# Altium PCB BMS Master.PcbDoc
Units mil, origin at the board's own origin, x right, y up, seen from the top; angles counter-clockwise.
Board outline 6000 x 4000 mil, 2 copper layers (Top Layer, Bottom Layer); 88 components, 63 nets, 313 pads, 57 vias.
Unrouted connection lines stored in the file: 47.
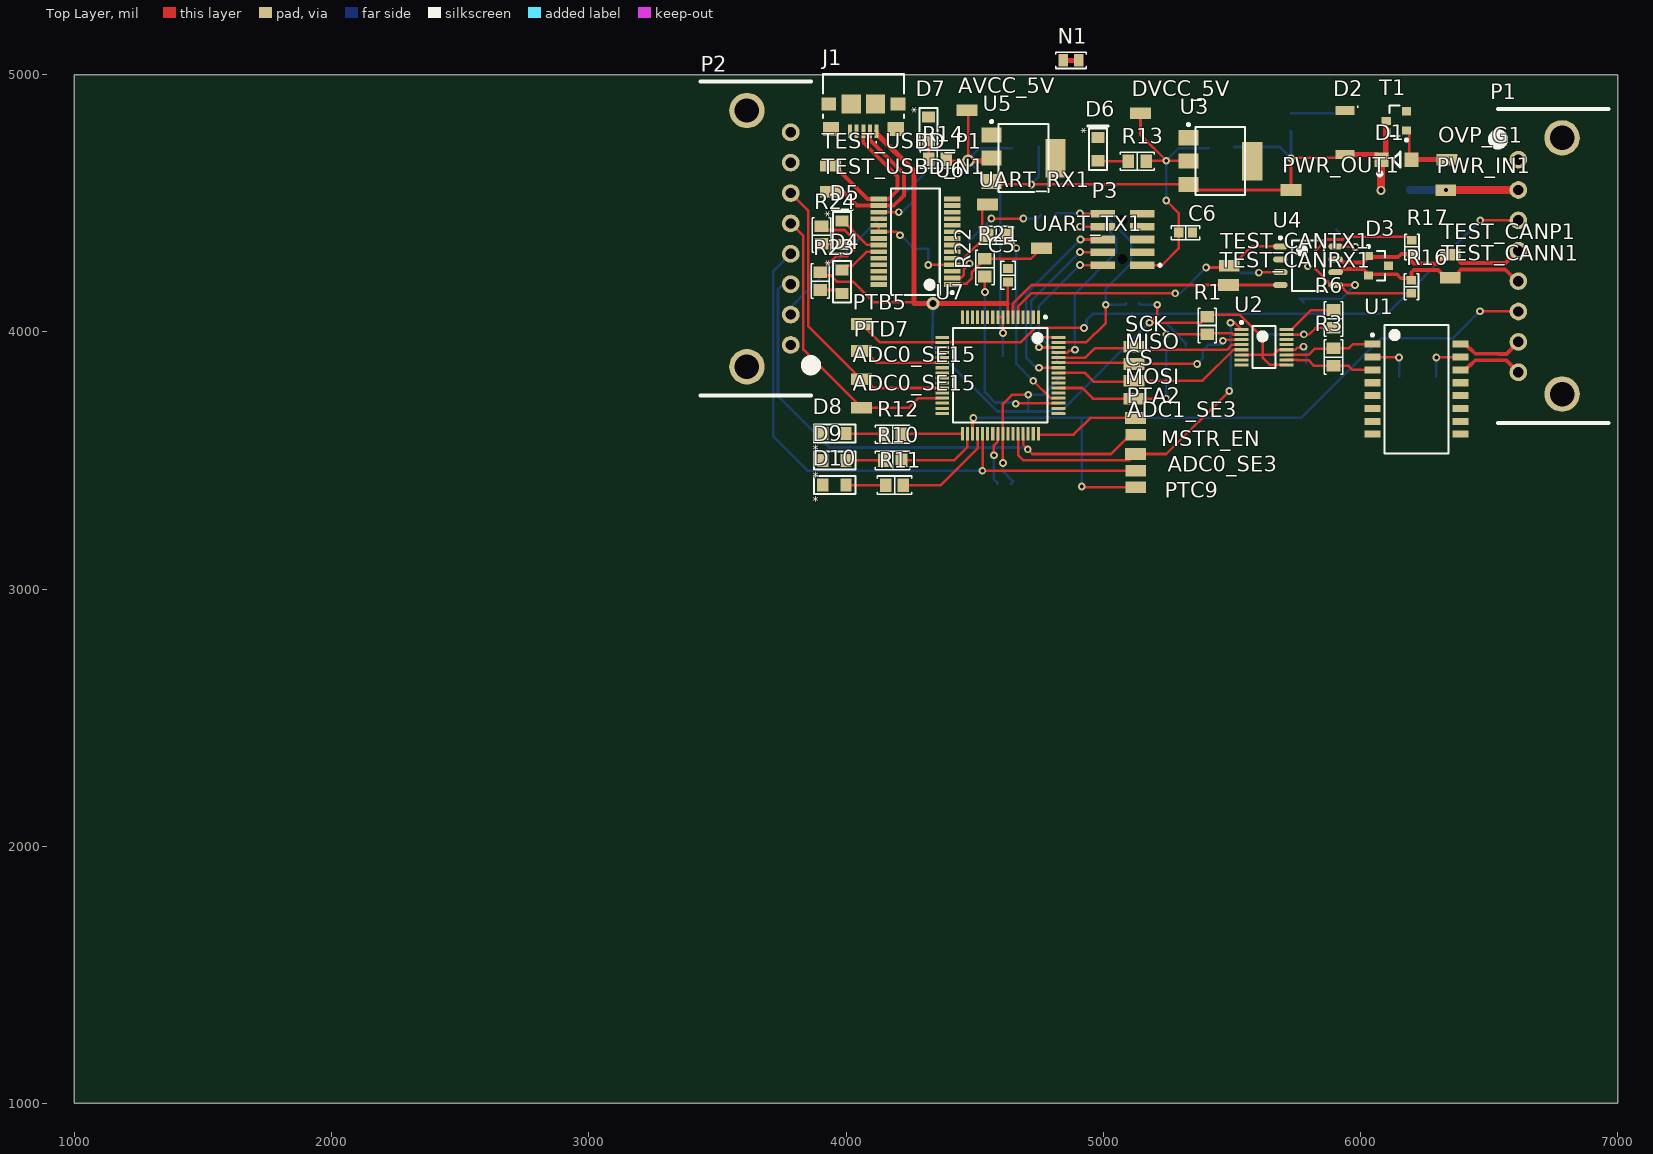
[diagram p0: Top Layer view]
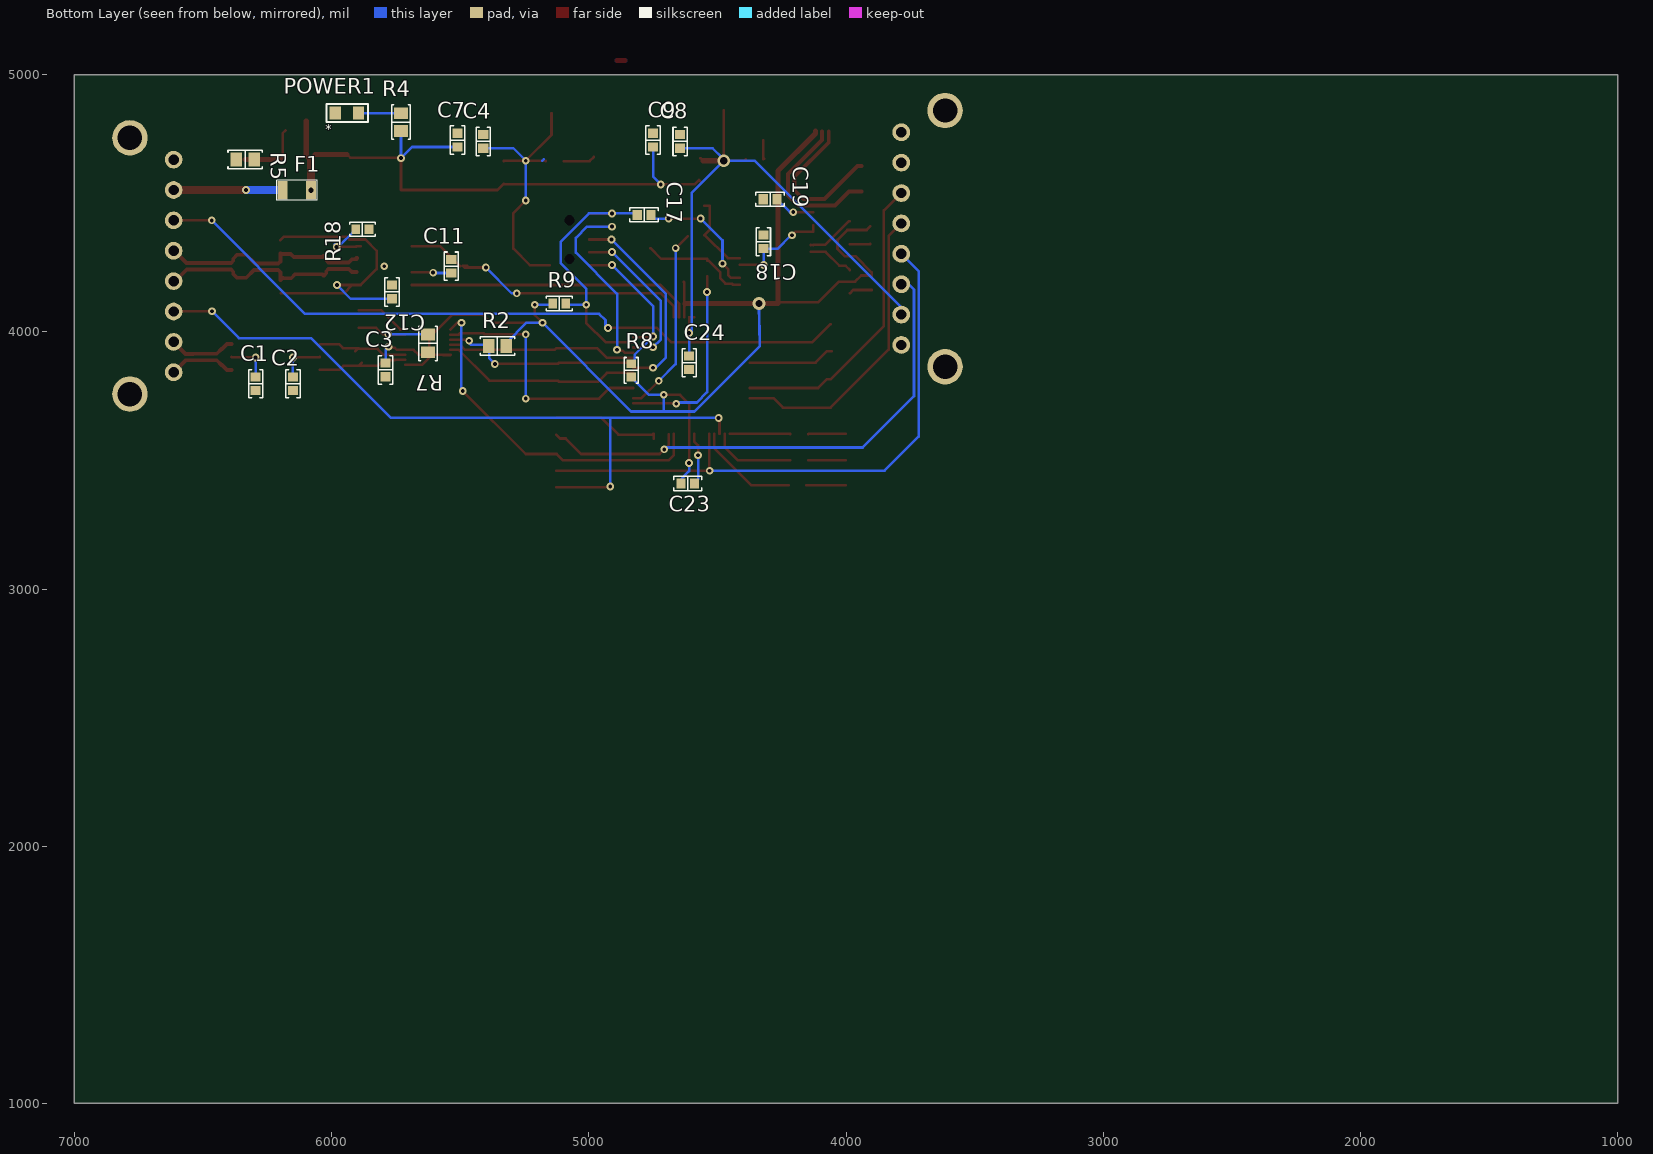
[diagram p1: Bottom Layer view, seen from below]
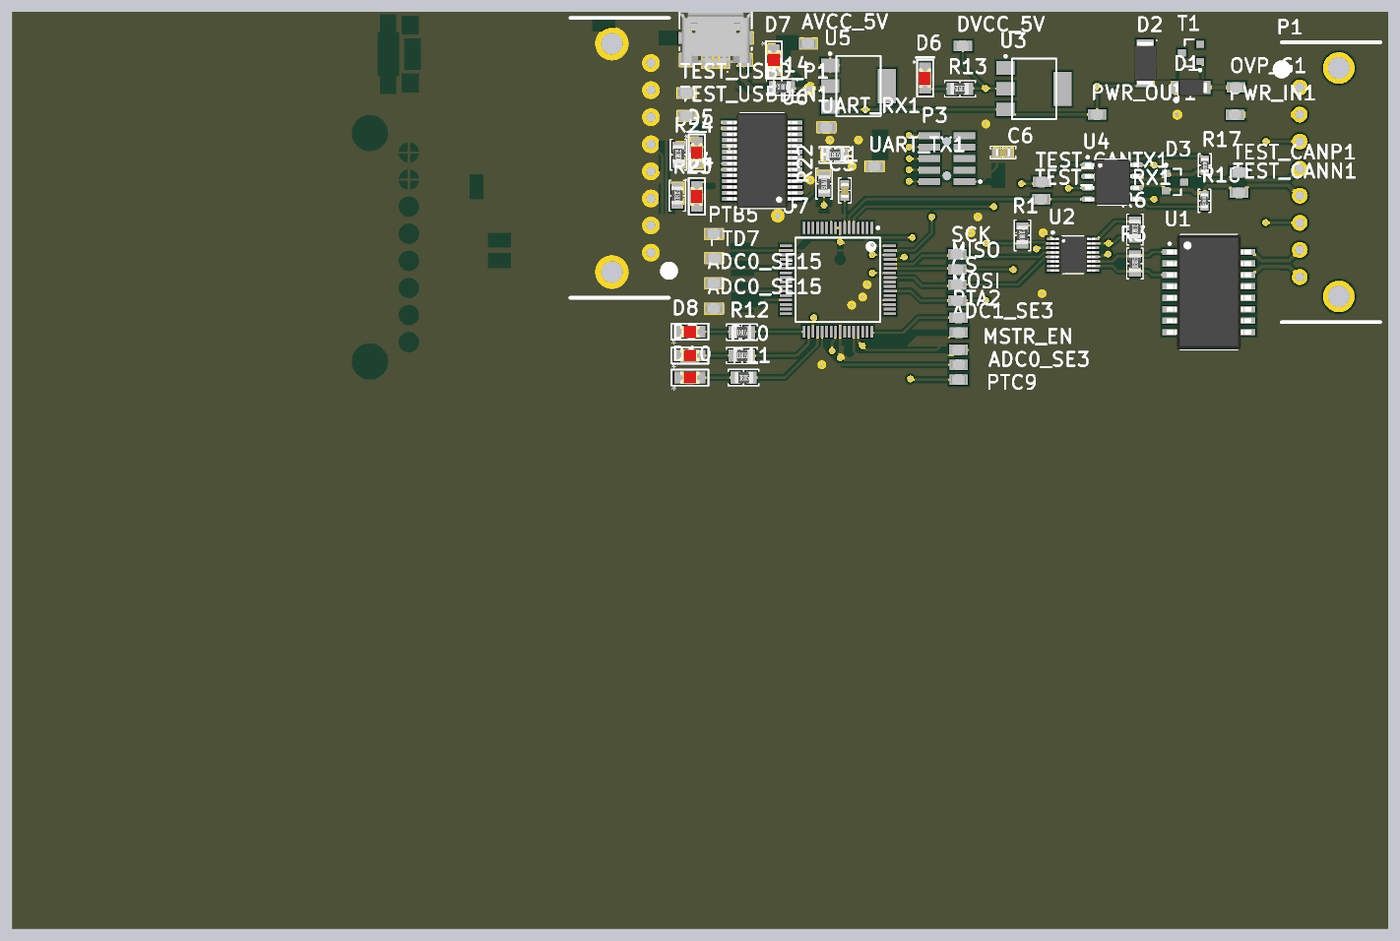
[diagram p2: 3D render of the assembled board from above, using the file's embedded part models]
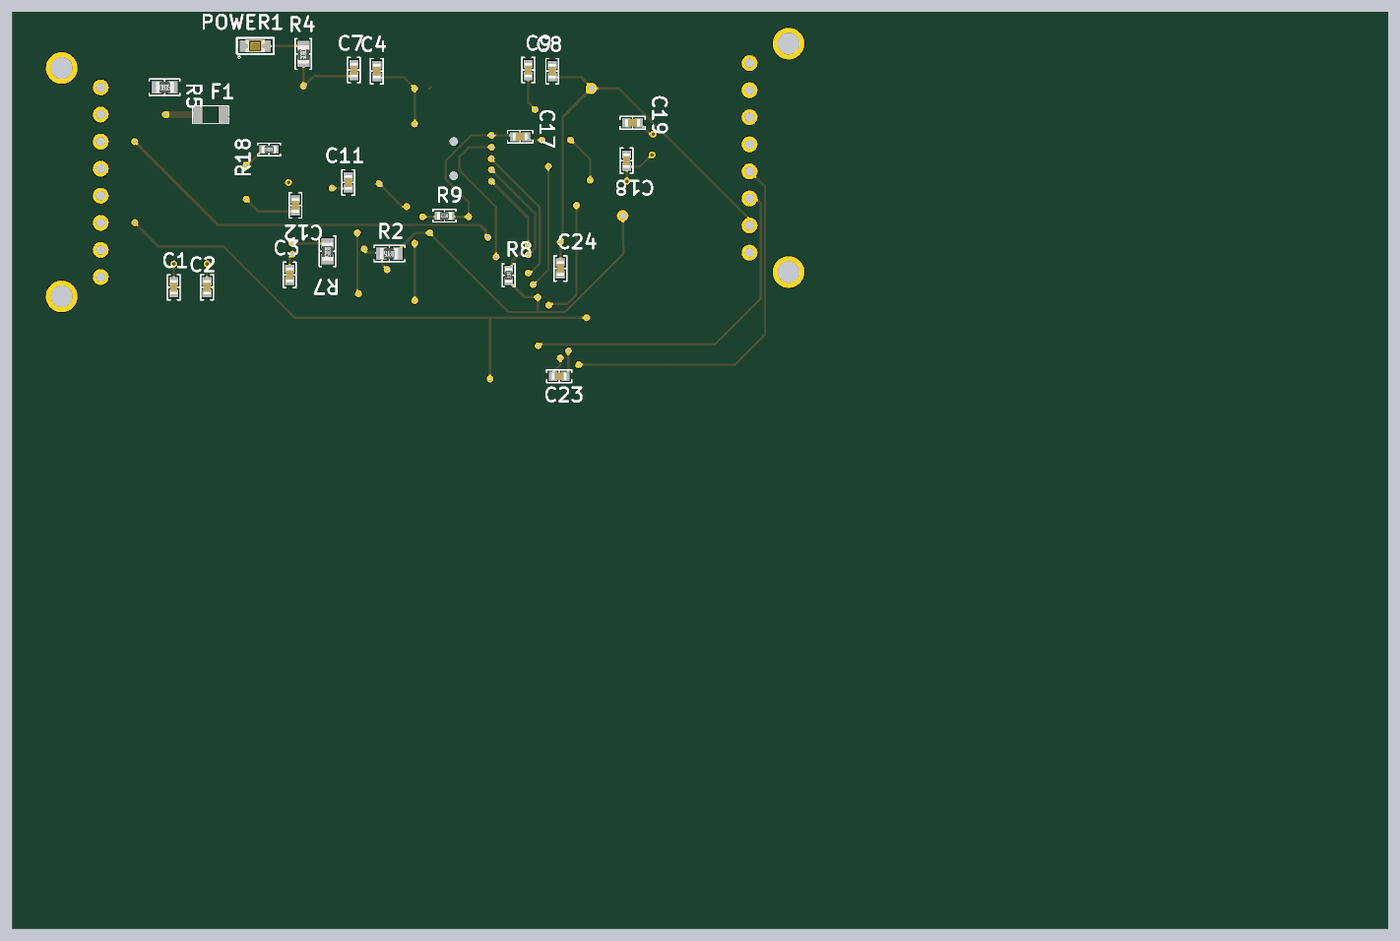
[diagram p3: 3D render of the assembled board from below, using the file's embedded part models]

## Layer stack, top to bottom
Top Solder: solder mask 0.4, Solder Resist, Dk 3.5
Top Layer: signal copper 1.4
Dielectric 1: dielectric 12.6, FR-4, Dk 4.8
Bottom Layer: signal copper 1.4
Bottom Solder: solder mask 0.4, Solder Resist, Dk 3.5

## Board outline
1000,1000 7000,1000 7000,5000 1000,5000

## Design rules (kind name [scope] priority, off if disabled: settings)
Clearance [All] p1: gap=10 ignorepadtopadclearanceinfootprint=FALSE except(0: Arc-Hole Track-Hole SMDPad-Hole THPad-Hole Via-Hole Fill-Hole Poly-Hole Region-Hole Text-Hole; 7: SMDPad-SMDPad; 8: Arc-Arc Arc-Track Arc-SMDPad Track-Track Track-SMDPad)
DiffPairsRouting [All] p1: maxlimit=10 minlimit=10 mostfreqgap=10 toplayer_minwidth=15 toplayer_maxwidth=15 toplayer_prefwidth=15 bottomlayer_minwidth=15 bottomlayer_maxwidth=15 bottomlayer_prefwidth=15 maxuncoupledlength=500
MatchedLengths "Schematic Matched Net Lengths" [InNet('D_N')] p1: tolerance=10 checknetsindiffpair=FALSE checkdiffpairvsdiffpair=TRUE checkxsignals=TRUE checkothers=TRUE
PolygonConnect [All] p1: connectstyle=Relief reliefconductorwidth=10 reliefentries=4 polygonreliefangle="90 Angle" airgapwidth=10
RoutingVias [All] p1: holewidth=28 width=50 viastyle="Through Hole" minholewidth=28 minwidth=50 maxholewidth=28 maxwidth=50
SolderMaskExpansion [All] p1: expansion=4
Width [All] p1: maxlimit=50 minlimit=10 preferedwidth=10
29 further rules are at their usual default settings.

## Classes and differential pairs
component class U_USB: C17 C18 C19 D4 D5 J1 R21 R22 R23 R24 TEST_USBD_N1 TEST_USBD_P1 U6 UART_RX1 UART_TX1
component class U_RVP_OVP_LC: D1 D2 OVP_G1 POWER1 PWR_IN1 PWR_OUT1 R4 R5 T1
component class U_Power: AVCC_5V C4 C7 C8 C9 D6 D7 DVCC_5V R13 R14 U3 U5
component class U_MCU_MKE185F512VLH16: ADC0_SE3 ADC0_SE15 ADC1_SE3 C5 C6 C23 C24 CS D8 D9 D10 MISO MOSI MSTR_EN P3 PTA2 PTB5 PTC9 PTD7 R8 R9 R10 R11 R12 SCK TEST_CANRX1 TEST_CANTX1 U7
component class U_CAN_Tranceiver: C11 C12 D3 R16 R17 R18 TEST_CANN1 TEST_CANP1 U4
component class "BMS Master": C1 C2 C3 F1 N1 P1 P2 R1 R2 R3 R6 R7 U1 U2
differential pair ISO: +ISO_P -ISO_N
differential pair D: +D_P -D_N
differential pair CAN: +CAN_P -CAN_N

## Components (designator, comment, footprint, x,y, rotation, side; value= is the part's Value field where it differs from the comment)
ADC0_SE3 "RCU-0C" RCU-0C#1 5126.65,3460 r270 top
ADC0_SE15 "RCU-0C" RCU-0C#1 4060,3815 r90 top
ADC0_SE15 "RCU-0C" RCU-0C#1 4060,3705 r90 top
ADC1_SE3 "RCU-0C" RCU-0C#1 5126.65,3600 r270 top
AVCC_5V "RCU-0C" RCU-0C#1 4470,4860.63 r90 top
C1 "Capacitor MLCC 27pf 25V CAP 0603/1608" "CAP 0603/1608" 6295,3797.8 r90 bottom value=27pf
C2 "Capacitor MLCC 27pf 25V CAP 0603/1608" "CAP 0603/1608" 6150,3797.8 r90 bottom value=27pf
C3 "Capacitor MLCC 0.10uf 25V CAP 0603/1608" "CAP 0603/1608" 5790,3851.85 r270 bottom value=0.10uf
C4 "Capacitor MLCC 10uf 25V CAP 0603/1608" "CAP 0603/1608" 5410,4740 r270 bottom value=10uf
C5 "Capacitor MLCC 0.10uf 25V CAP 0603/1608" "CAP 0603/1608" 4630,4220 r270 top value=0.10uf
C6 "Capacitor MLCC 0.10uf 16V CAP 0603/1608" "CAP 0603/1608" 5320,4385.55 r180 top value=0.10uf
C7 "Capacitor MLCC 10uf 25V CAP 0603/1608" "CAP 0603/1608" 5510,4745 r270 bottom value=10uf
C8 "Capacitor MLCC 10uf 25V CAP 0603/1608" "CAP 0603/1608" 4645,4740 r270 bottom value=10uf
C9 "Capacitor MLCC 10uf 25V CAP 0603/1608" "CAP 0603/1608" 4750,4745 r270 bottom value=10uf
C11 "Capacitor MLCC 0.10uf 50V CAP 0603/1608" "CAP 0603/1608" 5534.45,4255 r270 bottom value=0.10uf
C12 "Capacitor MLCC 4700pf 50V CAP 0603/1608" "CAP 0603/1608" 5765,4155 r270 bottom value=4700pf
C17 "Capacitor MLCC 0.10uf 25V CAP 0603/1608" "CAP 0603/1608" 4785,4454.45 r0 bottom value=0.10uf
C18 "Capacitor MLCC 0.10uf 25V CAP 0603/1608" "CAP 0603/1608" 4321.1,4350 r270 bottom value=0.10uf
C19 "Capacitor MLCC 0.10uf 25V CAP 0603/1608" "CAP 0603/1608" 4295,4515 r180 bottom value=0.10uf
C23 "Capacitor MLCC 100pf 25V CAP 0603/1608" "CAP 0603/1608" 4615,3410 r0 bottom value=100pf
C24 "Capacitor MLCC 0.10uf 25V CAP 0603/1608" "CAP 0603/1608" 4609.84,3879.8 r90 bottom value=0.10uf
CS "RCU-0C" RCU-0C#1 5120,3810 r90 top
D1 "DDZ9701-7" SOD123F 6140,4669.29 r180 top value=14Vz
D2 "DIODE" SOD-128 5940,4775 r270 top value=5A
D3 "NUP1105LT1G" "SOT-23 (TO-236)" 6070,4256.81 r0 top value=TVS_24V
D4 "" 0805_LED 3985,4194.72 r90 top value=Green
D5 "" 0805_LED 3985,4385 r90 top value=Red
D6 "LED" 0805_LED 4980,4710 r90 top value=Red
D7 "LED" 0805_LED 4321.1,4790 r90 top value=Green
D8 "LED" 0805_LED 3955,3604.21 r180 top value=Green
D9 "LED" 0805_LED 3955,3500 r180 top value=Green
D10 "LED" 0805_LED 3955,3403.94 r180 top value=Green
DVCC_5V "RCU-0C" RCU-0C#1 5145,4850 r90 top
F1 "2.2A" "PTC Fuse 1206/3216" 6135,4550 r0 bottom
J1 "1981568-1" TECO-1981568-5_V 4067.24,4779.69 r180 top value=CONN
MISO "RCU-0C" RCU-0C#1 5120,3875 r90 top
MOSI "RCU-0C" RCU-0C#1 5120,3740 r90 top
MSTR_EN "RCU-0C" RCU-0C#1 5125,3525 r270 top
N1 "Net_Tie" Net_Tie 4875,5055 r0 top
OVP_G1 "RCU-0C" RCU-0C#1 6336.18,4669.29 r90 top
P1 "2-1445054-8" 2-1445054-8 6613.74,4669.29 r90 top
P2 "2-1445054-8" 2-1445054-8 3785,3948.78 r270 top
P3 "5103309-1" HDR2X5_SMT 5075,4358.62 r90 top value=CONN
POWER1 "LED" 0805_LED 5940,4850 r0 bottom value=Green
PTA2 "RCU-0C" RCU-0C#1 5125,3665 r270 top
PTB5 "RCU-0C" RCU-0C#1 4060,4030 r90 top
PTC9 "RCU-0C" RCU-0C#1 5126.65,3395 r90 top
PTD7 "RCU-0C" RCU-0C#2 4064.04,3925 r90 top
PWR_IN1 "RCU-0C" RCU-0C#1 6331.48,4550 r90 top
PWR_OUT1 "RCU-0C" RCU-0C#1 5730,4551.18 r90 top
R1 "Resistor 10k 0805 1/10W 10%" "RES 0805/2012" 5404.45,4024.45 r90 top value=10k
R2 "Resistor 10k 0805 1/10W 10%" "RES 0805/2012" 5355,3945 r0 bottom value=10k
R3 "Resistor 120 0805 1/10W 10%" "RES 0805/2012" 5895,3901.85 r90 top value=120
R4 "Resistor 470 0805 1/10W 1%" "RES 0805/2012" 5730,4815 r270 bottom value=470
R5 "Resistor 47k 0805 1/10W 1%" "RES 0805/2012" 6335.55,4670 r180 bottom value=47k
R6 "Resistor 1.5k 0805 1/10W 10%" "RES 0805/2012" 5895,4050 r90 top value=1.5k
R7 "Resistor 1.0k 0805 1/10W 10%" "RES 0805/2012" 5625,3955 r270 bottom value=1.0k
R8 "Resistor 10k 0603 1/10W 1%" "RES 0603/1608" 4835,3850 r270 bottom value=10k
R9 "Resistor 10k 0603 1/10W 5%" "RES 0603/1608" 5115,4110 r0 bottom value=10k
R10 "Resistor 200 0805 1/10W 5%" "RES 0805/2012" 4181.46,3500 r0 top value=200
R11 "Resistor 200 0805 1/10W 5%" "RES 0805/2012" 4188.62,3403.94 r0 top value=200
R12 "Resistor 200 0805 1/10W 5%" "RES 0805/2012" 4181.46,3601.85 r0 top value=200
R13 "Resistor 200 0805 1/10W 5%" "RES 0805/2012" 5132.2,4663.39 r180 top value=200
R14 "Resistor 200 0805 1/10W 5%" "RES 0805/2012" 4355.55,4670.77 r180 top value=200
R16 "Resistor 62 0603 1/10W 5%" "RES 0603/1608" 6198.03,4175 r270 top value=62
R17 "Resistor 62 0603 1/10W 5%" "RES 0603/1608" 6200,4330 r270 top value=62
R18 "Resistor 100 0603 1/10W 10%" "RES 0603/1608" 5880,4398.7 r0 bottom value=100
R21 "Resistor 1.0k 0805 1/4W 1%" "RES 0805/2012" 4540,4249.45 r270 top value=1.0k
R22 "Resistor 1.0k 0805 1/4W 1%" "RES 0805/2012" 4585,4375 r0 top value=1.0k
R23 "Resistor 1.0k 0805 1/4W 1%" "RES 0805/2012" 3900,4196.85 r90 top value=1.0k
R24 "Resistor 1.0k 0805 1/4W 1%" "RES 0805/2012" 3905,4376.14 r90 top value=1.0k
SCK "RCU-0C" RCU-0C#1 5120,3942.2 r90 top
T1 "DMG2302UK-7" SOT23-3 6139.65,4820 r180 top value=N_Channel
TEST_CANN1 "RCU-0C" RCU-0C#1 6349.2,4210 r90 top
TEST_CANP1 "RCU-0C" RCU-0C#1 6349.2,4299.21 r90 top
TEST_CANRX1 "RCU-0C" RCU-0C#1 5486.97,4181.81 r90 top
TEST_CANTX1 "RCU-0C" RCU-0C#1 5490,4256.81 r90 top
TEST_USBD_N1 "RCU-0C" RCU-0C#1 3940,4545 r90 top
TEST_USBD_P1 "RCU-0C" RCU-0C#1 3940,4645 r90 top
U1 "HX1188NLT" HX1188NLT 6217.48,3776.85 r0 top
U2 "LTC6820" MSOP-16 5625,3940 r0 top
U3 "NCP1117ST50T3G" SOT-223-3 5455.28,4663.39 r0 top value="5V 1.0A"
U4 "MCP2561 CAN Transceiver" SOIC-8 5795.98,4256.81 r0 top value=CAN/UART
U5 "NCP1117ST50T3G" SOT-223-3 4690,4675 r0 top value="5V 1.0A"
U6 "FT232RL" SSOP-28 4270,4350 r180 top
U7 "" TQFP64 4600,3830.59 r270 top
UART_RX1 "RCU-0C" RCU-0C#1 4550,4495 r90 top
UART_TX1 "RCU-0C" RCU-0C#1 4760,4325 r90 top

## Footprints (in the part's own frame and the unit in brackets; to place one, negate y for a bottom-side part, rotate by r counter-clockwise, add the part's x,y. Pads: shape width x height; smd on the part's side, far side on the other; paste and mask are expansions set on the pad)
2-1445054-8 [mm] "8p through hole connector"
  round 1.75 hole 1.02: 1(0,0) 2(-3,0) 3(-6,0) 4(-9,0) 5(-12,0) 6(-15,0) 7(-18,0) 8(-21,0)
  round 3.5 hole 2.41: 9(-23.15,-4.32) 10(2.15,-4.32)
  silkscreen extent -26,-8.92 5,2.5, body extent -26,-8.92 5,0, height 4.37
0805_LED [mm]
  rect 1.1x1.3 smd: 1(-1.15,0) 2(1.15,0)
  silkscreen extent -2.06,-0.89 2.03,0.89, body extent -1.05,-0.67 1.05,0.68, height 0.9
"CAP 0603/1608" [mm] "Chip Capacitor, 2-Leads, Body 1.60x0.80mm, IPC Medium Density"
  rect 0.9x1 smd: 1(-0.675,0) 2(0.675,0)
  silkscreen extent -1.4,-0.7 1.4,0.7, body extent -0.8,-0.41 0.8,0.41, height 0.82
HDR2X5_SMT [mm] "Header, 10-Leads, Body 3.43x6.35mm, Pitch 1.27mm"
  rect 0.76x2.4 smd: 1(-2.54,-1.95) 2(-2.54,1.95) 3(-1.27,-1.95) 4(-1.27,1.95) 5(0,-1.95) 6(0,1.95) 7(1.27,-1.95) 8(1.27,1.95) 9(2.54,-1.95) 10(2.54,1.95)
  round 0 hole 1 unplated: MH1(-1.905,0) MH2(1.905,0)
  silkscreen extent -2.66,-3.83 -2.42,-3.58, body extent -3.17,-1.72 3.17,1.72, height 4.55
HX1188NLT [mm] "XFRMR MAGNETIC 1PORT 1:1 10/100"
  rect 1.6x0.7 smd: 1(-4.35,4.445) 2(-4.35,3.175) 3(-4.35,1.905) 4(-4.35,0.635) 5(-4.35,-0.635) 6(-4.35,-1.905) 7(-4.35,-3.175) 8(-4.35,-4.445) 9(4.35,-4.445) 10(4.35,-3.175) 11(4.35,-1.905) 12(4.35,-0.635) 13(4.35,0.635) 14(4.35,1.905) 15(4.35,3.175) 16(4.35,4.445)
  silkscreen extent -4.47,-6.35 3.15,6.35, body extent -4.7,-6.35 4.7,6.35, height 5.97
MSOP-16 [mm]
  rect 1.35x0.3 smd: 1(-2.225,1.75) 2(-2.225,1.25) 3(-2.225,0.75) 4(-2.225,0.25) 5(-2.225,-0.25) 6(-2.225,-0.75) 7(-2.225,-1.25) 8(-2.225,-1.75) 9(2.225,-1.75) 10(2.225,-1.25) 11(2.225,-0.75) 12(2.225,-0.25) 13(2.225,0.25) 14(2.225,0.75) 15(2.225,1.25) 16(2.225,1.75)
  silkscreen extent -2.35,-2.08 1.15,2.57, body extent -2.45,-2.05 2.45,2.05, height 1.1
Net_Tie [mm] "Chip Resistor, 2-Leads, Body 2.00x1.25mm, IPC High Density"
  rect 0.95x1.25 smd: 1(-0.775,0) 2(0.775,0)
  Top Layer lines w0.5: -0.381,0 0.381,0
  silkscreen extent -1.5,-0.8 1.5,0.8
"PTC Fuse 1206/3216" [mm]
  rect 1x1.8 smd: 1(-1.4,0) 2(1.4,0)
  silkscreen extent -2,-1 2,1, body extent -1.75,-1 1.75,1, height 1
RCU-0C#1 [mm]
  rect 1.15x2.05 smd: 1(0,0)
  body extent -0.6,-0.77 0.6,0.82, height 1.16
RCU-0C#2 [mm]
  rect 1.15x2.05 smd: 1(0,0.103)
  body extent -0.6,-0.77 0.6,0.82, height 1.16
"RES 0603/1608" [mm] "Chip Resistor, 2-Leads, Body 1.60x0.80mm, IPC Medium Density"
  rect 0.85x0.95 smd: 1(-0.65,0) 2(0.65,0)
  silkscreen extent -1.27,-0.7 1.27,0.7, body extent -0.8,-0.4 0.8,0.4, height 0.45
"RES 0805/2012" [mm] "Chip Resistor, 2-Leads, Body 2.00x1.25mm, IPC Medium Density"
  rect 1.15x1.35 smd: 1(-0.875,0) 2(0.875,0)
  silkscreen extent -1.7,-0.9 1.7,0.9, body extent -0.95,-0.62 1.05,0.63, height 0.6
SOD123F [mm] "SODFL, 2-Leads, Body 1.80x3.50mm, IPC Low Density"
  rect 1.35x1.45 smd: 1(-1.475,0) 2(1.475,0)
  silkscreen extent -0.38,-0.76 1.75,1.5, body extent -1.75,-0.95 1.75,0.95, height 1.15
SOD-128 [mm] "SOD-128, 2-Leads, Body 2.40x4.70mm, IPC Medium Density"
  rect 0.9x1.9 smd: 1(-2.175,0) 2(2.175,0)
  silkscreen extent -2.57,1.2 -2.48,1.3, body extent -2.35,-1.25 2.35,1.25, height 0.85
SOIC-8 [mm] "SOIC, 8-Leads, Body 4.90x3.90mm, Pitch 1.27mm, IPC Medium Density"
  oval 1.45x0.6 smd: 1(-2.725,1.905) 2(-2.725,0.635) 3(-2.725,-0.635) 4(-2.725,-1.905) 5(2.725,-1.905) 6(2.725,-0.635) 7(2.725,0.635) 8(2.725,1.905)
  silkscreen extent -2.85,-2.5 1.6,2.88, body extent -3,-2.5 3,2.5, height 1.75
SOT23-3 [mm] "SOT23, 3-Leads, Body 2.92x2.37mm, Pitch 0.95mm, IPC Medium Density, NUP2105L"
  rect 0.9x0.8 smd: 1(-1,0.95) 2(-1,-0.95) 3(1,0)
  silkscreen extent -1.13,-1.5 0.7,2.02, body extent -0.7,-1.52 0.7,1.52, height 1.11
"SOT-23 (TO-236)" [mm]
  rect 0.9x0.8 smd: 1(-1,0.95) 2(-1,-0.95) 3(1,0)
  silkscreen extent -1.12,-1.46 0.65,2.02, body extent -0.65,-1.46 0.65,1.46, height 1.11
SOT-223-3 [mm] "SOT223127P600-8N, NCP1117STAT3G, MMBT4403-7-F"
  rect 2x1.5 smd: 1(-3.15,2.3) 2(-3.15,0) 3(-3.15,-2.3)
  rect 2x3.8 smd: THM(3.15,0)
  silkscreen extent -3.27,-3.35 2.45,3.72, body extent -1.85,-3.35 1.85,3.35, height 1.8
SSOP-28 [mm] "hi"
  rect 1.65x0.457 smd: 1(-3.625,4.225) 2(-3.625,3.575) 3(-3.625,2.925) 4(-3.625,2.275) 5(-3.625,1.625) 6(-3.625,0.975) 7(-3.625,0.325) 8(-3.625,-0.325) 9(-3.625,-0.975) 10(-3.625,-1.625) 11(-3.625,-2.275) 12(-3.625,-2.925) 13(-3.625,-3.575) 14(-3.625,-4.225) 15(3.625,-4.225) 16(3.625,-3.575) 17(3.625,-2.925) 18(3.625,-2.275) 19(3.625,-1.625) 20(3.625,-0.975) 21(3.625,-0.325) 22(3.625,0.325) 23(3.625,0.975) 24(3.625,1.625) 25(3.625,2.275) 26(3.625,2.925) 27(3.625,3.575) 28(3.625,4.225)
  silkscreen extent -3.75,-5.25 2.4,5.25, body extent -3.9,-5.25 3.9,5.25, height 2
TECO-1981568-5_V [mm] "SMD, 5-Leads, Body 8x5.9mm, Pitch 0.65mm"
  rect 0.4x1.35 smd: 1(-1.3,0) 2(-0.65,0) 3(0,0) 4(0.65,0) 5(1.3,0)
  rect 1.6x1.4 smd: 6(-3.2,-0.225) 7(3.2,-0.225)
  rect 1.45x1.3 smd: 8(-3.425,-2.675) 9(3.425,-2.675)
  rect 1.9x1.9 smd: 10(-1.2,-2.675) 11(1.2,-2.675)
  silkscreen extent -4,-5.63 4,1.12, body extent -4,-5.5 4,0.1, height 2.79
TQFP64 [mm] "TSQFP, 64-Leads, Body 10.00x10.00mm, Pitch 0.50mm, IPC Medium Density, MKE18F512VLH16"
  rect 1.35x0.3 smd: 1(-5.75,3.75) 2(-5.75,3.25) 3(-5.75,2.75) 4(-5.75,2.25) 5(-5.75,1.75) 6(-5.75,1.25) 7(-5.75,0.75) 8(-5.75,0.25) 9(-5.75,-0.25) 10(-5.75,-0.75) 11(-5.75,-1.25) 12(-5.75,-1.75) 13(-5.75,-2.25) 14(-5.75,-2.75) 15(-5.75,-3.25) 16(-5.75,-3.75) 33(5.75,-3.75) 34(5.75,-3.25) 35(5.75,-2.75) 36(5.75,-2.25) 37(5.75,-1.75) 38(5.75,-1.25) 39(5.75,-0.75) 40(5.75,-0.25) 41(5.75,0.25) 42(5.75,0.75) 43(5.75,1.25) 44(5.75,1.75) 45(5.75,2.25) 46(5.75,2.75) 47(5.75,3.25) 48(5.75,3.75)
  rect 0.3x1.35 smd: 17(-3.75,-5.75) 18(-3.25,-5.75) 19(-2.75,-5.75) 20(-2.25,-5.75) 21(-1.75,-5.75) 22(-1.25,-5.75) 23(-0.75,-5.75) 24(-0.25,-5.75) 25(0.25,-5.75) 26(0.75,-5.75) 27(1.25,-5.75) 28(1.75,-5.75) 29(2.25,-5.75) 30(2.75,-5.75) 31(3.25,-5.75) 32(3.75,-5.75) 49(3.75,5.75) 50(3.25,5.75) 51(2.75,5.75) 52(2.25,5.75) 53(1.75,5.75) 54(1.25,5.75) 55(0.75,5.75) 56(0.25,5.75) 57(-0.25,5.75) 58(-0.75,5.75) 59(-1.25,5.75) 60(-1.75,5.75) 61(-2.25,5.75) 62(-2.75,5.75) 63(-3.25,5.75) 64(-3.75,5.75)
  silkscreen extent -5.87,-4.67 4.67,4.68, body extent -5,-5 5,5, height 1.6

## Part data
ADC0_SE3 ADC0_SE15 ADC0_SE15 ADC1_SE3 AVCC_5V CS DVCC_5V MISO MOSI MSTR_EN OVP_G1 PTA2 PTB5 PTC9 PTD7 PWR_IN1 PWR_OUT1 SCK TEST_CANN1 TEST_CANP1 TEST_CANRX1 TEST_CANTX1 TEST_USBD_N1 TEST_USBD_P1 UART_RX1 UART_TX1: library part 5, Manufacturer_id=1, Package=0603, ComponentLink1Description=Datasheet, ComponentLink1URL=https://www.te.com/commerce/DocumentDelivery/DDEController?Action=srchrtrv&DocNm=1773266&DocType=DS&DocLang=English, Drawer_id=1, idTable=5, Link=https://www.digikey.com/product-detail/en/te-connectivity-amp-connectors/RCU-0C/A106145CT-ND/3477802, MfrPartNo=RCU-0C, Name=RCU-0C_Test_Point
C1 C2: library part 515, Dielectric=Ceramic, Manufacturer_id=1, Package="CAP 0603/1608", Voltage_Rating=25V, Created_By="Nick Mah", Created_Date=10/20/2018, Drawer_id=1, idCapacitor=515, Name="Cap_27pf_25V_CAP 0603/1608"
C3 C5 C17 C18 C19 C24: library part 583, Dielectric=Ceramic, Manufacturer_id=1, Package="CAP 0603/1608", Voltage_Rating=25V, Created_By="Nick Mah", Created_Date=10/20/2018, Drawer_id=1, idCapacitor=583, Name="Cap_0.10uf_25V_CAP 0603/1608"
C4 C7 C8 C9: library part 595, Dielectric=Ceramic, Manufacturer_id=1, Package="CAP 0603/1608", Voltage_Rating=25V, Created_By="Nick Mah", Created_Date=10/20/2018, Drawer_id=1, idCapacitor=595, Name="Cap_10uf_25V_CAP 0603/1608"
C6: library part 223, Dielectric=Ceramic, Manufacturer_id=1, Package="CAP 0603/1608", Voltage_Rating=16V, Created_By="Nick Mah", Created_Date=10/20/2018, Drawer_id=1, idCapacitor=223, Name="Cap_0.10uf_16V_CAP 0603/1608"
C11: library part 943, Dielectric=Ceramic, Manufacturer_id=1, Package="CAP 0603/1608", Voltage_Rating=50V, Created_By="Nick Mah", Created_Date=10/20/2018, Drawer_id=1, idCapacitor=943, Name="Cap_0.10uf_50V_CAP 0603/1608"
C12: library part 929, Dielectric=Ceramic, Manufacturer_id=1, Package="CAP 0603/1608", Voltage_Rating=50V, Created_By="Nick Mah", Created_Date=10/20/2018, Drawer_id=1, idCapacitor=929, Name="Cap_4700pf_50V_CAP 0603/1608"
C23: library part 529, Dielectric=Ceramic, Manufacturer_id=1, Package="CAP 0603/1608", Voltage_Rating=25V, Created_By="Nick Mah", Created_Date=10/20/2018, Drawer_id=1, idCapacitor=529, Name="Cap_100pf_25V_CAP 0603/1608"
D1: library part 10, "Zener Diode 14V 500mW ±5% Surface Mount SOD-123", Manufacturer_id=8, Package=SOD-123, Power=500mW, Supplier1PartNo=DDZ9701-7DICT-ND, ComponentLink1Description=Datasheet, ComponentLink1URL=https://www.diodes.com/assets/Datasheets/ds30410.pdf, Drawer_id=1, idDiode=10, Link=https://www.digikey.com/product-detail/en/diodes-incorporated/DDZ9701-7/DDZ9701-7DICT-ND/3877402, MfrPartNo=DDZ9701-7, Name=DDZ9701, Num_Circuits=1, Supplier1=Digi-Key, Type=Zener
D2: library part 12, "DIODE SCHOTTKY 30V 5A TMINIP2", Manufacturer_id=1, MfrPartNo=DB2431200L, Package=SOD-128, Power=30V, Supplier1PartNo=DB2431200LCT-ND, ComponentLink1Description=Datasheet, ComponentLink1URL=https://industrial.panasonic.com/content/data/SC/ds/ds4/DB2431200L_E.pdf, Drawer_id=1, Ic=5A, idDiode=12, Link=https://www.digikey.com/product-detail/en/panasonic-electronic-components/DB2431200L/DB2431200LCT-ND/3884430, Name=DB2431200L, Num_Circuits=1, Supplier1=Digi-Key, Type=Schottky
D3: library part 7, "ESD Protection Diode", Manufacturer_id=1, Package=SOT-23, Power=350W, Supplier1PartNo=NUP1105LT1GOSCT-ND, ComponentLink1URL=https://www.digikey.com/product-detail/en/on-semiconductor/NUP1105LT1G/NUP1105LT1GOSCT-ND/2122067, Drawer_id=1, Ic=8A, idDiode=7, Link=https://www.digikey.com/product-detail/en/on-semiconductor/NUP1105LT1G/NUP1105LT1GOSCT-ND/2122067, MfrPartNo=NUP1105LT1G, Name=SOT-23_350W_Zener, Num_Circuits=1, Supplier1=Digikey, Type=Zener
D4 D7 D8 D9 D10 POWER1: library part 2, Manufacturer_id=1, Package=0805, Brightness=7mcd, Drawer_id=1, Id=20mA, idLED=2, Link=https://www.digikey.com/product-detail/en/visual-communications-company-vcc/CMD17-21VGD-TR8/L62505CT-ND/254936, Name=CMD17_0805_GREEN, Vf=2.1V
D5 D6: library part 1, Package=0805, Drawer_id=1, idLED=1, Manufacturer_id=1, Name=LED_0805_RED, Vf=0.7V
F1: library part 8, "Fuse", Manufacturer_id=1, MfrPartNo=1206L110/12SLYR, Drawer_id=1, I_hold=1.1A, I_max=50A, I_trip=2.2A, idFuse=8, LatestRevisionDate=17-Jul-2002, LatestRevisionNote="Re-released for DXP Platform.", Link=https://www.digikey.com/product-detail/en/littelfuse-inc/1206L110-12SLYR/F5764CT-ND/3593809, Name=Resettable, PackageDescription="Thru-Hole; 2 Leads", PackageReference=PIN-W2/E2.8, Pd_Typ=.8W, Published=8-Jun-2000, Publisher="Altium Limited", V_max=12V
J1: library part 5, "USB Micro Type B", Manufacturer_id=1, ComponentLink1Description=Datasheet, Created_By=Aiku, Created_Date=10/20/2018, Drawer_id=1, idConn=5, Link=https://www.mouser.com/ProductDetail/TE-Connectivity-AMP/1981568-1?qs=sGAEpiMZZMulM8LPOQ%252bykzEIUPbUCiSfqsfxH3Oq%252bYo%3d, MfrPartNo=1981568-1, Name="TE USB Micro", Num_Contacts=5, Supplier1=TE
N1 U7: library part 1, Drawer_id=1, Manufacturer_id=1
  N1: idFuse=3, idShunt=1, Name="Net Tie"
  U7: idMCU=1, Name="MKE18F512VLH16 MCU"
P1 P2: library part 12, "1x8 connector", Manufacturer_id=5, Supplier1PartNo=2-1445054-8-ND, ComponentLink1Description=Datasheet, Created_By=Graydon, Created_Date=11/10/2018, Drawer_id=1, idConn=12, Link=https://www.digikey.com/product-detail/en/te-connectivity-amp-connectors/2-1445054-8/2-1445054-8-ND/1890093, MfrPartNo=2-1445054-8, Name="Micro MATE-N-LOK 1x8", Num_Contacts=8, Num_Rows=1, Supplier1=Digi-Key
P3: library part 4, "2 row connector", Manufacturer_id=1, Voltage_Rating=None, ComponentLink1Description=Datasheet, Created_By=Aiku, Drawer_id=1, idConn=4, Link=https://www.digikey.com/product-detail/en/5103309-1/A33160-ND/1114898?utm_campaign=buynow&WT.z_cid=ref_octopart_dkc_buynow&utm_medium=aggregator&curr=usd&site=us&utm_source=octopart, MfrPartNo=5103309-1, Name=CONN_TE_2X5POS, Num_Contacts=10, Num_Rows=2, Pitch=2.54mm
R1 R2: library part 2425, Manufacturer_id=1, Package=0805, Power=1/10W, Tolerance=10%, ComponentLink1Description=Datasheet, Created_By="Nick Mah", Created_Date=2018-10-20, Drawer_id=1, idResistor=2425, Name=Res_10k_0805_1/10W_10%, Supplier 1=Digi-Key
R3: library part 2402, Manufacturer_id=1, Package=0805, Power=1/10W, Tolerance=10%, ComponentLink1Description=Datasheet, Created_By="Nick Mah", Created_Date=2018-10-20, Drawer_id=1, idResistor=2402, Name=Res_120_0805_1/10W_10%, Supplier 1=Digi-Key
R4: library part 497, Manufacturer_id=1, Package=0805, Power=1/10W, Tolerance=1%, ComponentLink1Description=Datasheet, Created_By="Nick Mah", Created_Date=2018-10-20, Drawer_id=1, idResistor=497, Name=Res_470_0805_1/10W_1%, Supplier 1=Digi-Key
R5: library part 545, Manufacturer_id=1, Package=0805, Power=1/10W, Tolerance=1%, ComponentLink1Description=Datasheet, Created_By="Nick Mah", Created_Date=2018-10-20, Drawer_id=1, idResistor=545, Name=Res_47k_0805_1/10W_1%, Supplier 1=Digi-Key
R6: library part 2415, Manufacturer_id=1, Package=0805, Power=1/10W, Tolerance=10%, ComponentLink1Description=Datasheet, Created_By="Nick Mah", Created_Date=2018-10-20, Drawer_id=1, idResistor=2415, Name=Res_1.5k_0805_1/10W_10%, Supplier 1=Digi-Key
R7: library part 2413, Manufacturer_id=1, Package=0805, Power=1/10W, Tolerance=10%, ComponentLink1Description=Datasheet, Created_By="Nick Mah", Created_Date=2018-10-20, Drawer_id=1, idResistor=2413, Name=Res_1.0k_0805_1/10W_10%, Supplier 1=Digi-Key
R8: library part 313, Manufacturer_id=1, Package=0603, Power=1/10W, Tolerance=1%, ComponentLink1Description=Datasheet, Created_By="Nick Mah", Created_Date=2018-10-20, Drawer_id=1, idResistor=313, Name=Res_10k_0603_1/10W_1%, Supplier 1=Digi-Key
R9: library part 1393, Manufacturer_id=1, Package=0603, Power=1/10W, Tolerance=5%, ComponentLink1Description=Datasheet, Created_By="Nick Mah", Created_Date=2018-10-20, Drawer_id=1, idResistor=1393, Name=Res_10k_0603_1/10W_5%, Supplier 1=Digi-Key
R10 R11 R12 R13 R14: library part 1568, Manufacturer_id=1, Package=0805, Power=1/10W, Tolerance=5%, ComponentLink1Description=Datasheet, Created_By="Nick Mah", Created_Date=2018-10-20, Drawer_id=1, idResistor=1568, Name=Res_200_0805_1/10W_5%, Supplier 1=Digi-Key
R16 R17: library part 1340, Manufacturer_id=1, Package=0603, Power=1/10W, Tolerance=5%, ComponentLink1Description=Datasheet, Created_By="Nick Mah", Created_Date=2018-10-20, Drawer_id=1, idResistor=1340, Name=Res_62_0603_1/10W_5%, Supplier 1=Digi-Key
R18: library part 2293, Manufacturer_id=1, Package=0603, Power=1/10W, Tolerance=10%, ComponentLink1Description=Datasheet, Created_By="Nick Mah", Created_Date=2018-10-20, Drawer_id=1, idResistor=2293, Name=Res_100_0603_1/10W_10%, Supplier 1=Digi-Key
R21 R22 R23 R24: library part 721, Manufacturer_id=1, Package=0805, Power=1/4W, Tolerance=1%, ComponentLink1Description=Datasheet, Created_By="Nick Mah", Created_Date=2018-10-20, Drawer_id=1, idResistor=721, Name=Res_1.0k_0805_1/4W_1%, Supplier 1=Digi-Key
T1: library part 6, "MOSFET N-CHANNEL 30V 5A SOT23", Manufacturer_id=1, Package=SOT-23, Created_By=Angel, Drawer_id=1, Id=2.8A, idFETs=6, Link=https://www.digikey.com/product-detail/en/diodes-incorporated/DMG2302UK-7/DMG2302UK-7DICT-ND/6010163, MfrPartNo=DMG2302UK-7, Name=DMG2302UK-7, Num_Circuits=1, Rds_On=90mOhm, Supplier1=Digi-Key, Vdss=20V, Vgs(Max)=1V, Vgs(typ)=800mV
U1: library part 8, Manufacturer_id=1, Created_By=Angel, Drawer_id=1, idFuse=3, idIC_Interface=8, Link=https://www.digikey.com/product-detail/en/pulse-electronics-network/HX1188NLT/553-1536-1-ND/3151809?utm_adgroup=Transformers&slid=&gclid=CjwKCAiAhp_jBRAxEiwAXbniXRrdDycXKcdMEppGgTacWMJf80VG2GQDdYxlb9yRzxEZsto0mBbjlhoCtm4QAvD_BwE, MfrPartNo=HX1188NLT, Name=HX1188NLT, Num_Circuits=2, Package=HX1188NLT, Type="Magnetic Isolation"
U2: library part 7, "soSPI Isolated / Communications Interface", Manufacturer_id=1, Package=MSOP-16, Created_By=Angel, Drawer_id=1, idFuse=3, idIC_Interface=7, Link=https://www.mouser.com/ProductDetail/Analog-Devices/LTC6820IMSPBF?qs=sGAEpiMZZMvi6wO7nhr1LyTLeBC7dAWQpR44bZH0zYY%3d, MfrPartNo=LTC6820, Name=LTC6820, Num_Circuits=1, Protocol=isoSPI, Type=bidirectional, Vin(Max)=5.5V, Vin(Min)=2.7V
U3 U5: library part 16, "Linear Voltage Regulator IC Positive Fixed 1 Output 5V 1A SOT-223", Current_Rating=1A, Dropout_Voltage="1.2V @ 800mA", Manufacturer_id=1, Package=SOT-223-3, ComponentLink1Description=Datasheet, ComponentLink1URL=https://www.onsemi.com/pub/Collateral/NCP1117-D.PDF, Created_By="Angel Delgado", Drawer_id=1, idPMIC_Lin=16, Link=https://www.digikey.com/product-detail/en/on-semiconductor/NCP1117ST50T3G/NCP1117ST50T3GOSCT-ND/1967217, MfrPartNo=NCP1117ST50T3G, Name="5V 1A LDO", Num_Outputs=1, Output_Config="5V Fixed", Vin(Max)=20V, Vout(Max)=5.05, Vout(Min)=4.95, Vout_Type=Fixed
U4: library part 5, Manufacturer_id=1, MfrPartNo=MCP2561, Package=SOIC-8, Created_By="Angel Delgado", Data_Rate=1Mbps, Drawer_id=1, idIC_Interface=5, Link=https://www.digikey.com/product-detail/en/microchip-technology/MCP2561T-E-SN/MCP2561T-E-SNCT-ND/5148846, Name="CAN Transceiver", Num_Circuits=1, Protocol=CAN, Type=Transceiver, Vin(Max)=5.5V, Vin(Min)=4.5V
U6: library part 3, Manufacturer_id=1, Created_By=Kyle, Drawer_id=1, idIC_Interface=3, Link=https://www.digikey.com/product-detail/en/ftdi-future-technology-devices-international-ltd/FT232RL-REEL/768-1007-1-ND/1836402, MfrPartNo=FT232RL, Name="USB FTDI", Protocol=UART, Vin(Max)=5.25, Vin(Min)=3.3

## Via types
v1: diameter 30, hole 15, Top Layer to Bottom Layer, 54 vias
v2: diameter 50, hole 28, Top Layer to Bottom Layer, 2 vias
v3: diameter 35, hole 20, Top Layer to Bottom Layer, 1 vias

## Nets (pads, with @x,y where several pads share a name; then routed paths per layer and width w, separated by ;. In a path a pad name is that pad's centre, name@x,y a point inside that pad or via, vN(x,y) a via of type N, cw(c..) or ccw(c..) an arc to the next point about the centre after c; other vN are vias at no path point)
12V: C7.2 C9.2 D1.2 D2.2 F1.1 PWR_OUT1.1 R4.2 T1.3 U3.3 U5.3 | length 2432.5
  Top Layer w10: U5.3 4571.54,4590 4588.7,4572.83 v1(4720,4572.83) U3.3 ; U3.3@5331.26,4575 5355.08,4551.18 PWR_OUT1.1 v1(5730,4675) 5731.65,4676.65 5927.28,4676.65 D2.2 ; D1.2@6064.8,4689.37 6083.41,4670.77 D1.2@6079.88,4667.24
  Top Layer w20: D2.2 D1.2@6064.8,4689.37 ; D1.2@6087.56,4674.92 6098.31,4685.67 T1.3@6098.31,4820
  Top Layer w30: v3(6079.88,4550) D1.2@6079.88,4667.24
  Bottom Layer w10: v1(4720,4572.83) 4750,4602.83 C9.2 ; C7.2 5686.57,4718.43 v1(5730,4675) ; 5730,4690 R4.2
+12V: F1.2 P1.2 PWR_IN1.1 | length 425.8
  Top Layer w10: PWR_IN1.1 v1(6332.67,4551.18)
  Top Layer w30: v1(6332.67,4551.18) P1.2
  Bottom Layer w10: F1.2 F1.2@6191.3,4551.18
  Bottom Layer w30: F1.2@6191.3,4551.18 v1(6332.67,4551.18)
ADC0_SE3: ADC0_SE3.1 P2.4 U7.37 | length 2345.7
  Top Layer w10: U7.37 4531.1,3460 ADC0_SE3.1
  Bottom Layer w10: P2.4 3717.55,4235.66 3717.55,3592.45 3850,3460 v1(4530,3460)
ADC0_SE13: ADC0_SE15.1@4060,3705 P2.5 U7.29 | length 1159.1
  Top Layer w10: P2.5 3834.45,4371.77 3834.45,3930.55 4060,3705 4245,3705 4282.01,3742.01 U7.29
ADC0_SE15: ADC0_SE15.1@4060,3815 P2.6 U7.27 | length 1165.8
  Top Layer w10: P2.6 3852.45,4471.88 3852.45,4022.55 4060,3815 4075,3815 4108.62,3781.38 U7.27
ADC1_SE3: ADC1_SE3.1 P2.3 U7.45 | length 2053.9
  Top Layer w10: U7.45@4688.58,3601.77 4688.58,3560.86 4724.44,3525 5030,3525 5090,3585 5111.65,3585 ADC1_SE3.1
  Bottom Layer w10: P2.3 3756.98,4185 3735.55,4163.57 3735.55,3749.45 3935,3550 4699.44,3550 v1(4706.51,3542.93)
AGND: C8.1 C9.1 C24.1 D7.2 N1.1 P2.7 P2.8 U5.1 U7.10
AVCC_5V: AVCC_5V.1 C8.2 C24.2 P2.1 P2.2 R14.1 U5.2 U7.8 U7.9 | length 2409.5
  Top Layer w10: R14.1 4395.77,4665 v2(4475,4665) AVCC_5V.1@4475,4860.63 ; U5.2@4555.98,4665 U5.2 ; U7.9 U7.8 4610,4056.81 v1(4610,3995)
  Top Layer w20: v2(4475,4665) U5.2@4555.98,4665
  Bottom Layer w10: P2.2 3785,4094.98 4355.02,4665 v2(4475,4665) 4600,4540 4600,4005 v1(4610,3995) ; v2@4480,4675 4518.43,4713.43 C8.2 ; C24.2 v1@4609.84,3995
CAN_N: D3.2 P1.5 R16.1 TEST_CANN1.1 U4.6 | length 823.1
  Top Layer w15: U4.6 5920.6,4231.81 5933.1,4244.31 5979.45,4244.31 6011.63,4244.31 6020.41,4235.52 6020.41,4227.66 6028.66,4219.41 D3.2 6034.78,4223.56 6141.55,4223.56 6156.83,4208.28 6187.25,4208.28 6188.8,4209.82 R16.1 6199.02,4201.57 6199.02,4231.21 6207.8,4240 6301.48,4240 6331.48,4210 TEST_CANN1.1 6366.92,4210 6382.06,4225.14 6382.06,4233.32 6390.84,4242.11 6562.89,4242.11 P1.5@6610,4195
CAN_P: D3.1 P1.4 R17.2 TEST_CANP1.1 U4.7 | length 816.6
  Top Layer w15: U4.7@5900.98,4286.81 U4.7@5903.27,4286.81 ; U4.7 5920.6,4281.81 5933.1,4269.31 5969.09,4269.31 6011.63,4269.31 6020.41,4278.1 6020.41,4285.96 6028.66,4294.21 D3.1 6034.78,4290.06 6146.84,4290.06 6158.8,4302.02 6196.62,4302.02 6199.02,4304.41 6199.02,4273.79 6207.8,4265 6297.27,4265 6331.48,4299.21 TEST_CANP1.1@6343.48,4299.21 ; TEST_CANP1.1 6366.92,4299.21 6382.06,4284.07 6382.06,4275.89 6390.84,4267.11 6564,4267.11 P1.4@6610,4313.11
CAN_RX: TEST_CANRX1.1 U4.4 U7.6 | length 1121.8
  Top Layer w10: U7.6 4649.21,4109.21 4721.81,4181.81 TEST_CANRX1.1 U4.4
CAN_TX: TEST_CANTX1.1 U4.1 U7.5 | length 1166.3
  Top Layer w10: U7.5 4668.9,4098.54 ; 4669.21,4098.54 4669.21,4098.86 4719.76,4149.41 v1(5280,4149.41) ; v1(5400,4250) 5483.19,4250 TEST_CANTX1.1 TEST_CANTX1.1@5472.28,4256.81 ; TEST_CANTX1.1@5500,4255 5576.81,4331.81 U4.1
  Bottom Layer w10: v1(5280,4149.41) 5299.41,4149.41 v1(5400,4250)
D_N: J1.2 TEST_USBD_N1.1 U6.16 | length 628.2
  Top Layer w15: TEST_USBD_N1.1 3987.85,4545 4042.11,4490.75 U6.16 4185.75,4490.75 4225,4530 4225,4613.44 4092.83,4745.61 J1.2
D_P: J1.3 TEST_USBD_P1.1 U6.15 | length 611.9
  Top Layer w15: TEST_USBD_P1.1 3955,4645 4083.66,4516.34 U6.15 4166.34,4516.34 4200,4550 4200,4603.09 4067.24,4735.85 J1.3
DGND: C1.1 C2.1 C3.2 C4.1 C5.1 C6.1 C7.1 C11.1 C12.1 C18.1 C19.1 C23.1 D3.3 D6.2 D8.2 D9.2 D10.2 J1.5 N1.2 P3.3 P3.5 R7.2 R18.1 U2.7 U2.8 U2.13 U2.14 U3.1 U4.2 U6.7 U6.18 U6.21 U6.25 U6.26 U7.40 | length 207.4
  Top Layer w10: v1(4575,3520) 4575,3557.88 4589.38,3572.25 4589.38,3603.43 U7.40
  Bottom Layer w10: v1(4575,3520) 4575,3426.57 4590,3411.57 C23.1
DVCC: C18.2 U6.4 U6.19 U6.20 | length 395.9
  Top Layer w10: U6.19 U6.20 4196.61,4388.39 v1(4210,4375) ; v1@4321.1,4260.43 U6.4
  Bottom Layer w10: v1@4215.26,4373.37 4265.2,4323.43 C18.2 4320,4322.32 v1(4320,4260)
DVCC_5V: C3.1 C4.2 C5.2 C6.2 C23.2 DVCC_5V.1 J1.1 P3.1 R1.2 R2.1 R8.2 R9.2 R13.1 R23.2 R24.2 U2.6 U2.9 U2.12 U3.2 U7.7 U7.41 | length 6372.2
  Top Layer w10: R24.2 3919.97,4395.62 3994.73,4395.62 4032.98,4357.37 4032.98,4322.08 4005.12,4294.21 3962.91,4294.21 R23.2 3900,4218.7 3940.67,4218.7 3964.37,4195 4027.49,4195 4107.49,4115 4265,4115 ; v1(4610,3490) 4610,3564.76 4609.84,3564.61 U7.41 4609.84,3719.84 4645,3755 v1(4708.27,3755) ; U7.7 4629.53,4192.95 C5.2 ; DVCC_5V.1 5145,4765 v1(5245,4665) ; P3.1 5228.66,4258.62 5293.43,4323.39 C6.2 5293.43,4461.57 v1(5245,4510) ; R13.1 5168.27,4665 v1(5245,4665) ; v1(5210,4105) 5210,4065 v1(5180.22,4035.22) 5380.77,4035.22 R1.2 5412.44,4066.89 5530.27,4066.89 5620,3977.16 5620,3911.25 ; U3.2 5329.65,4665 v1(5245,4665) ; U2.6 5538.18,3909.69 5565,3909.69 5566.56,3911.25 5620,3911.25 ; U2.9 5648.9,3871.1 5620,3900 5620,3911.25 ; v1(5778.43,3942.2) 5774.6,3938.38 5754.83,3938.38 5746.61,3930.16 U2.12 5711.82,3929.38 5680.64,3929.38 5662.51,3911.25 5620,3911.25
  Top Layer w20: J1.1@4118.71,4779.69 4118.71,4771.29 4265,4625 4265,4115 ; 4265,4109.59 v2(4338.08,4109.59) 4625.63,4109.8 4626.21,4109.21
  Bottom Layer w10: v2(4338.08,4109.59) 4335,3944.54 4589.54,3690 4710,3690 ; v1(4610,3490) 4610,3458.43 4650,3418.43 C23.2 ; R8.2 4765.59,3755 v1(4708.27,3755) 4708.27,3691.73 4710,3690 ; R9.2 5145.59,4105 v1(5210,4105) ; 5174.45,4670.77 5180.22,4665 ; v1(5245,4510) v1(5245,4665) 5293.43,4713.43 C4.2 ; R2.1 5320.55,3956.88 5242.21,4035.22 v1(5180.22,4035.22) 4835,3690 4710,3690 ; v1(5778.43,3942.2) 5790,3930.63 C3.1
FTDI_GREEN: D4.2 U6.23 | length 193.4
  Top Layer w10: D4.2 4001.65,4256.65 4025.69,4256.65 4079.8,4310.77 4109.9,4310.77 U6.23@4110,4310.67 ; U6.23@4098.59,4310.55 4136.34,4310.55 U6.23@4137.28,4311.5
FTDI_RED: D5.2 U6.22 | length 182.2
  Top Layer w10: D5.2 3988.94,4430.28 4081.06,4338.15 4126.34,4338.15 U6.22 ; U6.22@4136.34,4338.03 U6.22@4137.28,4337.09
FTDI_UART_RX: R22.2 U7.52 | length 735.8
  Top Layer w10: R22.2@4615.63,4371.18 4662.32,4324.49 v1(4662.32,4325) ; v1(4727.95,3809.25) 4795.2,3742.01 U7.52
  Bottom Layer w10: v1(4662.32,4325) 4662.32,3874.88 v1(4727.95,3809.25)
FTDI_UART_TX: R21.2 U7.51 | length 756
  Top Layer w10: v1(4540,4155) R21.2 ; v1(4660,3720) 4662.32,3722.32 U7.51
  Bottom Layer w10: v1(4540,4155) 4540,3765 4580,3725 4655,3725 v1(4660,3720)
GND: D2.1 P1.1 POWER1.2 R5.1 T1.2
ISO_N: P1.8 U1.14 | length 259.9
  Top Layer w15: U1.14 6406.46,3851.85 6425.18,3870.57 6427.48,3870.57 6446.26,3889.35 6527.75,3889.35 6528.02,3889.07 6567.19,3889.07 P1.8
ISO_P: P1.7 U1.16 | length 259.9
  Top Layer w15: U1.16 6406.46,3951.85 6425.18,3933.13 6427.48,3933.13 6446.26,3914.35 6538.1,3914.35 6538.38,3914.07 6567.19,3914.07 P1.7
JTAG_RST: C17.2 P3.10 R9.1 U7.63 | length 1089
  Top Layer w10: U7.63 4876.12,3958.54 4877.57,3960 4902.43,3960 4903.88,3958.54 4933.54,3958.54 5010,4035 v1(5010,4105) ; v1(4910,4460) 4911.38,4458.62 P3.10
  Bottom Layer w10: C17.2 4817.13,4460 v1(4910,4460) 4999.57,4460 5109.69,4349.88 5109.69,4267.48 5010,4167.8 v1(5010,4105) 5084.41,4105 R9.1
JTAG_TCLK: P3.4 U7.62 | length 627.1
  Top Layer w10: v1(4750,3940) 4751.14,3938.86 U7.62 ; v1(4910,4310) 4996.85,4310 P3.4
  Bottom Layer w10: v1(4750,3940) 4749.44,3940 4720,3969.44 4720,3994.3 4720,4120 v1(4910,4310)
JTAG_TDI: P3.8 U7.61 | length 815.7
  Top Layer w10: U7.61 4860.39,3919.17 4867.39,3926.17 4886.17,3926.17 v1(4890,3930) ; v1(4910,4408.62) P3.8
  Bottom Layer w10: v1(4890,3930) 4890,4147.67 5050,4307.67 5050,4365 5006.38,4408.62 v1(4910,4408.62)
JTAG_TDO: P3.6 U7.58 | length 768
  Top Layer w10: v1(4750,3860) 4750.12,3860.12 U7.58 ; v1@4910,4360 v1(4911.38,4358.62) P3.6
  Bottom Layer w10: v1@4740,3860 4700,3900 4700,4147.24 v1(4911.38,4358.62)
JTAG_TMS: P3.2 R8.1 U7.64 | length 653.5
  Top Layer w10: v1(4750,3981.87) 4752.73,3979.13 4804.8,3979.13 4805.71,3978.23 U7.64 ; v1@4910,4258.62 P3.2
  Bottom Layer w10: R8.1 4833.03,3875.59 4821.3,3887.32 4821.3,3911.13 4750.56,3981.87 v1(4750,3981.87) 4750,4100 v1(4910,4260)
MSTR_EN: MSTR_EN.1 U2.1 U7.44 | length 1345.4
  Top Layer w10: U7.44 4668.9,3521.1 4690,3500 5100,3500 MSTR_EN.1 5245,3525 v1(5490,3770) ; v1(5495,4035.22) 5511.08,4035.22 U2.1
  Bottom Layer w10: v1(5490,3770) 5495,3775 v1(5495,4035.22)
NetC1_2: C1.2 U1.15 | length 170.1
  Top Layer w10: v1(6295,3900) 6295.93,3900.93 6387.82,3900.93 U1.15
  Bottom Layer w10: C1.2 v1(6295,3900)
NetC2_2: C2.2 U1.2 | length 180.2
  Top Layer w10: U1.2 6047.15,3900.93 6149.07,3900.93 v1(6150,3900)
  Bottom Layer w10: C2.2 v1(6150,3900)
NetC17_1: C17.1 U6.2 | length 506.2
  Top Layer w10: U6.2 4446.99,4209.25 4458.2,4220.46 4458.2,4243.2 v1(4480,4265) ; v1(4565,4440) v1(4689.57,4440)
  Bottom Layer w10: v1(4480,4265) 4480,4355 v1@4560,4435 ; v1(4689.57,4440) 4743.98,4440 C17.1
NetD1_1: D1.1 OVP_G1.1 R5.2 T1.1 | length 259.3
  Top Layer w10: T1.1 6189.76,4771.85 6189.76,4677.6 D1.1
  Top Layer w20: D1.1 OVP_G1.1
NetD4_1: D4.1 R23.1 | length 90.4
  Top Layer w10: R23.1 3972.05,4162.4 D4.1
NetD5_1: D5.1 R24.1 | length 80.8
  Top Layer w10: R24.1 3906.97,4339.72 D5.1
NetD6_1: D6.1 R13.2 | length 124.5
  Top Layer w10: D6.1@4980,4679.72 4996.34,4663.39 R13.2
NetD7_1: D7.1 R14.2 | length 77.3
  Top Layer w10: R14.2@4318.72,4673.15 R14.2 D7.1
NetD8_1: D8.1 R12.1 | length 147.7
  Top Layer w10: D8.1 4144.65,3604.21 R12.1
NetD9_1: D9.1 R10.1 | length 146.7
  Top Layer w10: D9.1 R10.1
NetD10_1: D10.1 R11.1 | length 153.9
  Top Layer w10: D10.1 R11.1
NetPOWER1_1: POWER1.1 R4.1 | length 165
  Bottom Layer w10: R4.1 5894.17,4849.45 POWER1.1
NetR3_1: R3.1 U1.3 U2.10 | length 365.8
  Top Layer w10: U2.10 5754.17,3890.79 5755,3889.96 5797.34,3889.96 5819.9,3867.4 R3.1 R3.1@5882.4,3880 ; R3.1@5896.73,3867.4 5953.54,3867.4 5969.09,3851.85 U1.3
NetR3_2: R3.2 U1.1 U2.11 | length 366.1
  Top Layer w10: U2.11 5797.34,3910.47 5820.77,3933.9 5898.27,3933.9 R3.2@5907.48,3924.68 ; R3.2 5955.39,3936.3 5970.94,3951.85 U1.1
NetR6_1: R6.1 R7.1 U2.15 | length 361.9
  Top Layer w10: U2.15 5779.21,3989.21 v1(5780,3990) 5800.55,3990 5826.1,4015.55 R6.1
  Bottom Layer w10: R7.1@5634.45,3980 R7.1 5625.55,3990 v1(5780,3990)
NetR6_2: R6.2 U2.16 | length 213.2
  Top Layer w10: U2.16 U2.16@5733.27,4008.9 ; U2.16@5733.27,4010.12 5807.6,4084.45 R6.2
NetR10_2: R10.2 U7.34 | length 329.9
  Top Layer w10: R10.2 4420,3500 4472.05,3552.05 U7.34
NetR11_2: R11.2 U7.36 | length 405.2
  Top Layer w10: R11.2 4368.94,3403.94 4511.42,3546.42 U7.36
NetR12_2: R12.2 U7.33 | length 236.2
  Top Layer w10: R12.2 4218.27,3604.21 U7.33@4451.14,3604.21
NetR21_1: R21.1 U6.1 UART_TX1.1 | length 424.1
  Top Layer w10: U6.1 4439.76,4183.66 4443.35,4187.25 4468.59,4187.25 4488.62,4207.28 4488.62,4231.22 4534.07,4276.67 4540,4276.67 R21.1 4718.9,4283.9 UART_TX1.1
NetR22_1: R22.1 U6.5 UART_RX1.1 | length 317.5
  Top Layer w10: U6.5 4459.29,4286.02 R22.1@4550,4375.55 ; UART_RX1.1@4550,4490 4530,4490 4530,4395.55 R22.1@4550,4375.55 ; R22.1 R22.1@4550,4375.55
PTA2: PTA2.1 U7.48 | length 425.5
  Top Layer w10: U7.48@4747.64,3583.54 U7.48 ; U7.48@4748.86,3604.21 4753.07,3600 4885,3600 4950,3665 PTA2.1
PTB5: P1.3 PTB5.1 U7.18 | length 2788.2
  Top Layer w10: PTB5.1 4131.46,3958.54 U7.18 4678.54,3958.54 4735,4015 v1(4925,4015) ; v1@6465,4433.62 v1(6465.55,4433.07) P1.3
  Bottom Layer w10: v1@4935,4015 4935,4045 4960,4070 6102.48,4070 v1(6465.55,4433.07)
PTC9: P1.6 PTC9.1 U7.35 | length 2835.7
  Top Layer w10: U7.35 4491.73,3661.73 v1(4495,3665) ; v1@4911.38,3395 PTC9.1 ; v1(6465,4080) 6612.48,4080 P1.6
  Bottom Layer w10: v1(4495,3665) 4915,3665 ; v1(4916.38,3398.43) 4916.38,3663.62 4915,3665 ; v1(6465,4080) 6360.59,3975.59 6079.68,3975.59 5769.09,3665 4915,3665
PTD7: PTD7.1 U7.22 | length 337.3
  Top Layer w10: PTD7.1@4055,3925 4073.08,3925 4118.27,3879.8 U7.22
SPIO.CS: CS.1 U2.5 U7.57 | length 777.5
  Top Layer w10: U7.57 4929.57,3840.43 4965,3805 5115,3805 CS.1 5386.06,3810 5506.22,3930.16 U2.5
SPIO.MISO: MISO.1 R2.2 U2.3 U7.59 | length 753.9
  Top Layer w10: U7.59 5115.2,3879.8 MISO.1 v1(5365,3875) ; v1@5475,3970 5475.47,3969.53 U2.3
  Bottom Layer w10: v1@5370,3880 5387.36,3897.36 5387.36,3927.36 5408.78,3948.78 5458.78,3948.78 v1@5470,3960
  other v1: 5465,3965
SPIO.MOSI: MOSI.1 R1.1 U2.2 U7.54 | length 982.6
  Top Layer w10: U7.54 4918.62,3781.38 4960,3740 MOSI.1 v1(5245,3740) ; v1(5245,3990) R1.1 5409.45,3995 5500.43,3995 5506.22,3989.21 U2.2
  Bottom Layer w10: v1(5245,3740) v1(5245,3990)
SPIO.SCK: SCK.1 U2.4 U7.60 | length 736.5
  Top Layer w10: U7.60 4930.59,3899.49 4966.65,3935.55 5126.65,3935.55 5132.2,3930 5480.61,3930 5500.45,3949.84 U2.4
SPLIT: C12.2 R16.2 R17.1 U4.5 | length 1201.6
  Top Layer w10: v1(5979.09,4181.81) U4.5@5920,4181.81 ; R16.2 5952.4,4149.41 U4.5@5920,4181.81 ; R17.1 6185.59,4370 5942.48,4370 5931.11,4358.62 5868.62,4358.62 5825,4315 5825,4243.35 5886.54,4181.81 U4.5 U4.5@5920,4181.81
  Bottom Layer w10: C12.2@5778.43,4115 C12.2 5925.71,4128.43 v1(5979.09,4181.81)
STBY: R18.2 U4.8 | length 201.2
  Top Layer w10: U4.8@5886.69,4331.81 U4.8 5904.17,4330.91 5979.09,4330.91 v1(5980,4330)
  Bottom Layer w10: R18.2 5905.59,4396.73 5917.32,4385 5919.29,4385 5964.29,4340 v1@5987.24,4340
VCC: C11.2 U4.3 | length 155.7
  Top Layer w10: v1(5605,4230) 5605.91,4230.91 5687.8,4230.91 U4.3
  Bottom Layer w10: C11.2 5603.43,4228.43 v1(5605,4230)
VCC_3V3: C19.2 U6.17 | length 161.8
  Top Layer w10: U6.17 v1(4204.84,4465.16)
  Bottom Layer w10: v1(4204.84,4465.16) 4218.58,4465.16 C19.2
pads on no net: J1.4 J1.6 J1.7 J1.8 J1.9 J1.10 J1.11 P1.9 P1.10 P2.9 P2.10 P3.7 P3.9 P3.MH1 P3.MH2 U1.4 U1.5 U1.6 U1.7 U1.8 U1.9 U1.10 U1.11 U1.12 U1.13 U3.THM U5.THM U6.3 U6.6 U6.8 U6.9 U6.10 U6.11 U6.12 U6.13 U6.14 U6.24 U6.27 U6.28 U7.1 U7.2 U7.3 U7.4 U7.11 U7.12 U7.13 U7.14 U7.15 U7.16 U7.17 U7.19 U7.20 U7.21 U7.23 U7.24 U7.25 U7.26 U7.28 U7.30 U7.31 U7.32 U7.38 U7.39 U7.42 U7.43 U7.46 U7.47 U7.49 U7.50 U7.53 U7.55 U7.56
copper on no net:
  other v1: 5795,4255

## Polygon pours and split planes (outlines as drawn)
no net on Top Layer "NONET_L01_P008" (solid, shelved, pour order 8): 1000,1000 7000,1000 7000,5000 1000,5000
AGND on Top Layer "Top GND" (solid, shelved, pour order 7): 1000,1000 7000,1000 7000,5000 1000,5000

## Text inside footprints (layer, text, board x,y; h text height)
D4: Top Overlay "*" at 3965,4254.72 h60 r90
D5: Top Overlay "*" at 3965,4445 h60 r90
D6: Top Overlay "*" at 4960,4770 h60 r90
D7: Top Overlay "*" at 4301.1,4850 h60 r90
D8: Top Overlay "*" at 3895,3584.21 h60 r180
D9: Top Overlay "*" at 3895,3480 h60 r180
D10: Top Overlay "*" at 3895,3383.94 h60 r180
POWER1: Bottom Overlay "*" at 6000,4830 h60 r180